# Altium PCB balenaFin HAT Template PCB.PcbDoc
Units mm, origin at the board's own origin, x right, y up, seen from the top; angles counter-clockwise.
Board outline 90 x 73 mm, 2 copper layers (Top Layer, Bottom Layer), stack 0.325 mm thick; 6 components, 3 nets, 68 pads, 0 vias.
Unrouted connection lines stored in the file: 12.
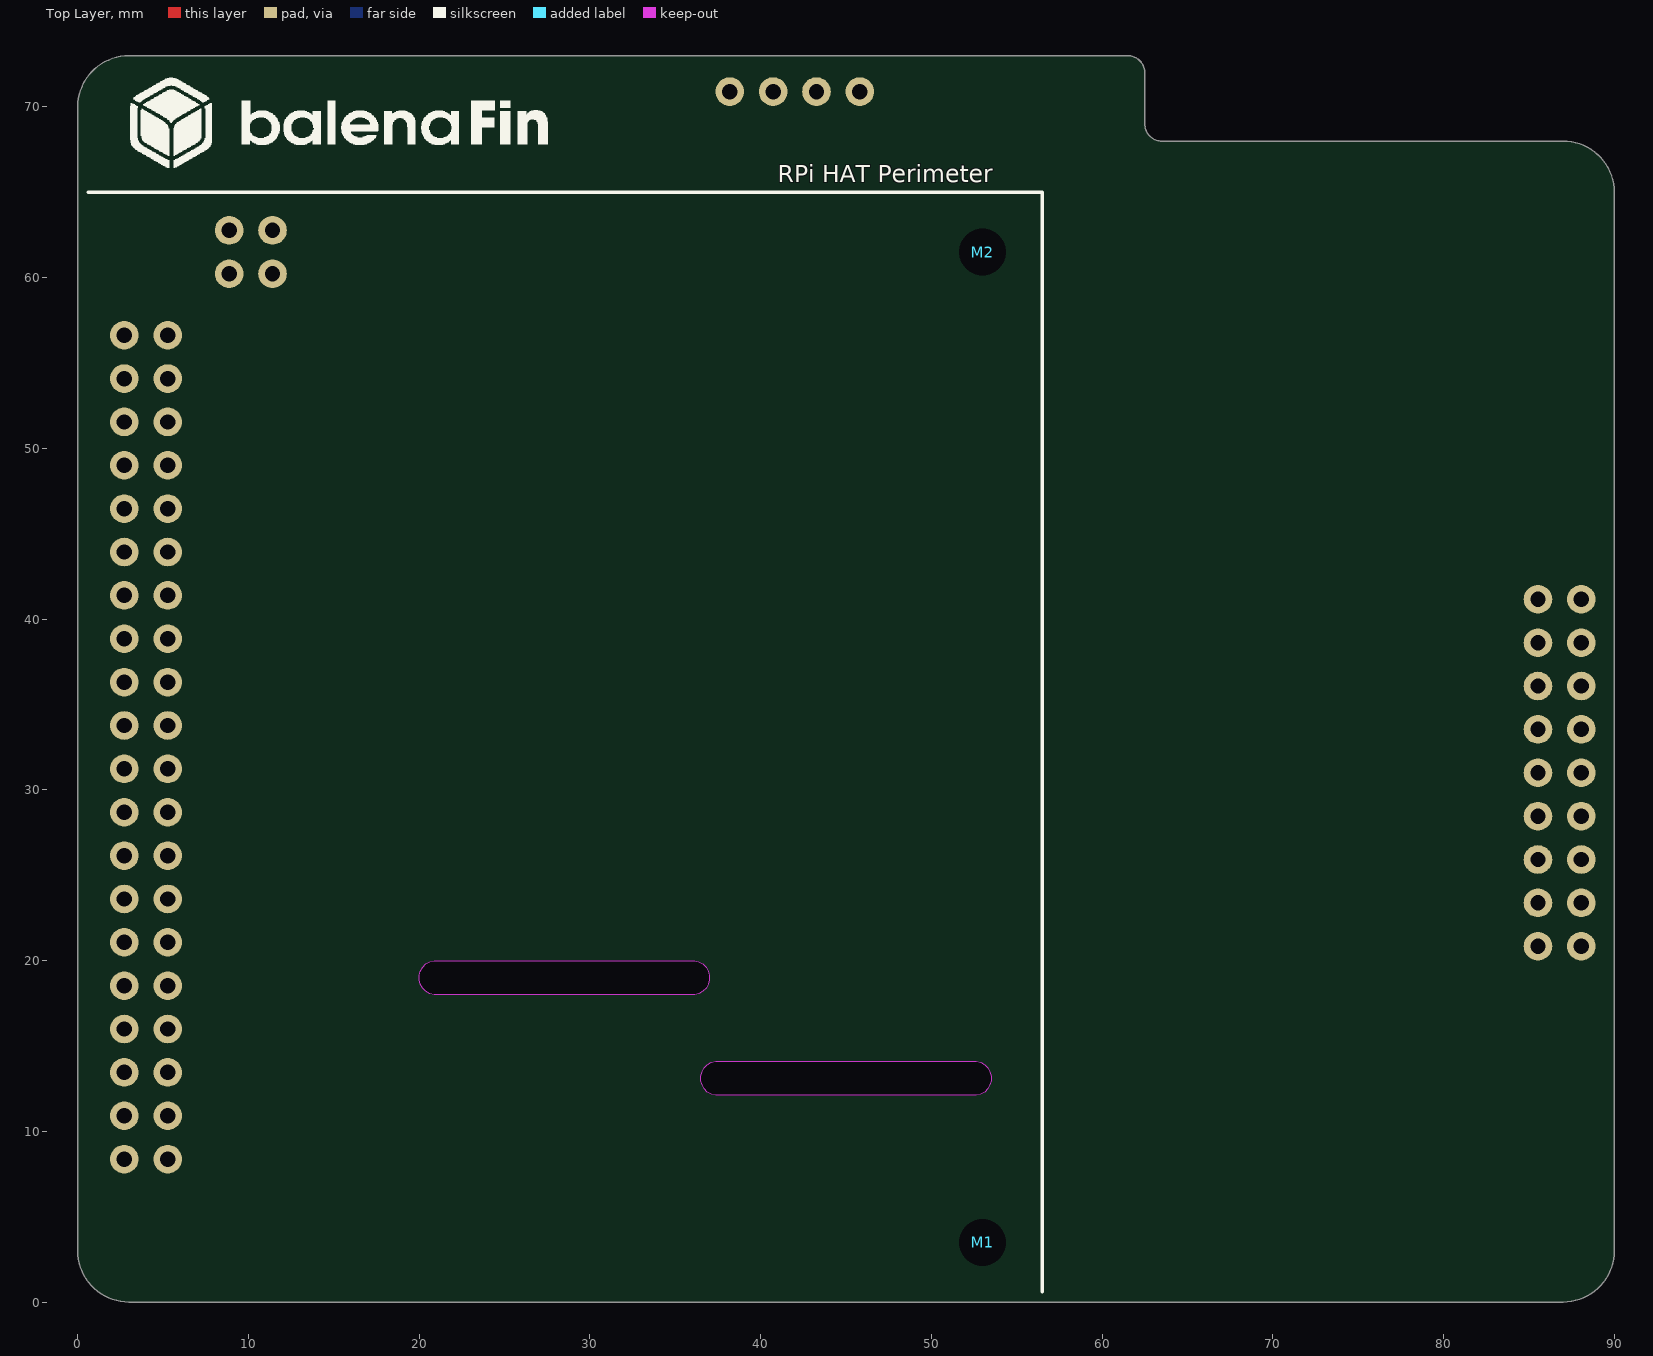
[diagram p0: Top Layer view]
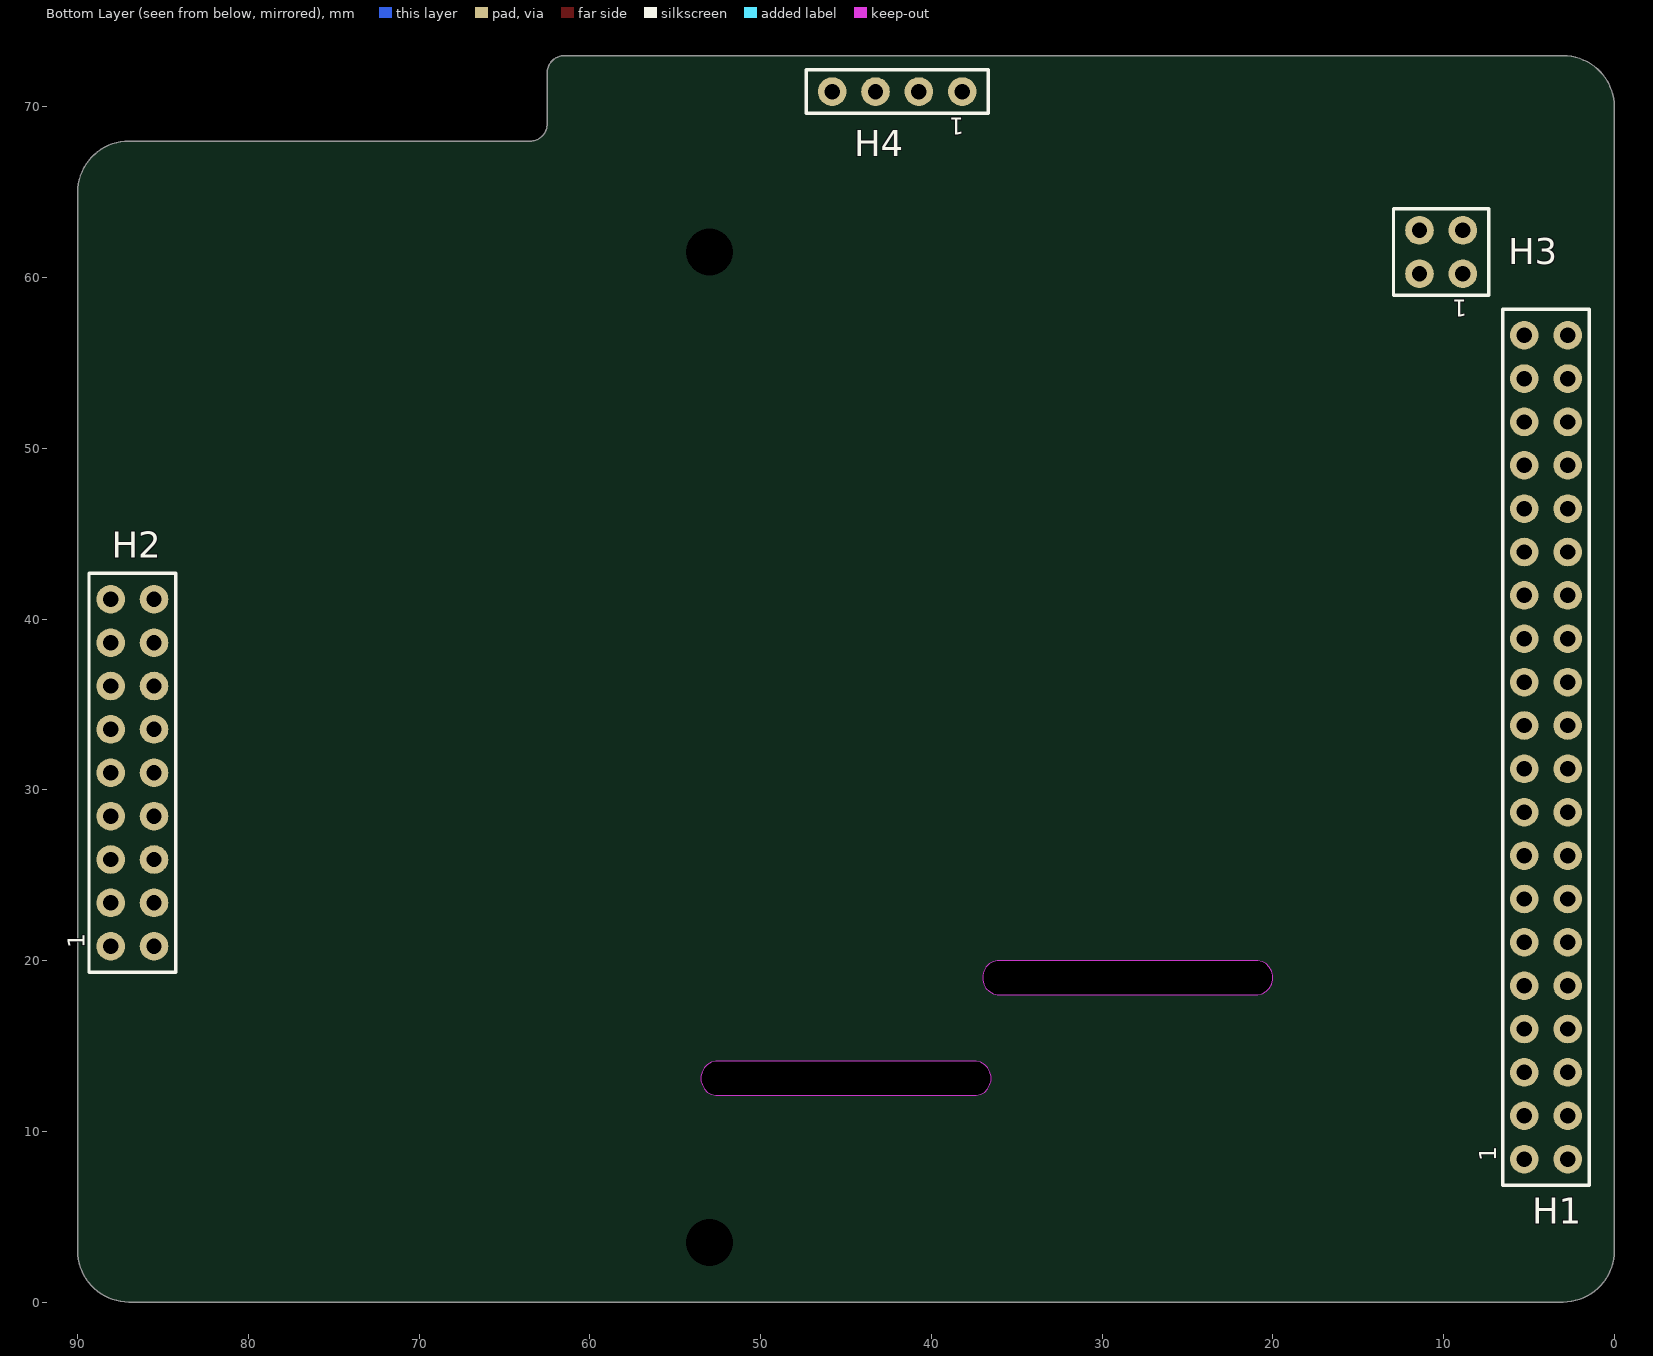
[diagram p1: Bottom Layer view, seen from below]

## Layer stack, top to bottom
Top Solder: solder mask 0.0102, Solder Resist, Dk 3.5
Top Layer: signal copper 0.0356
Core: core 0.254, FR-4, Dk 4.2
Bottom Layer: signal copper 0.0356
Bottom Solder: solder mask 0.0102, Solder Resist, Dk 3.5

## Board outline
0,3 0,70 cw(c3,70) 3,73 61.5,73 cw(c61.5,72) 62.5,72 62.5,69 ccw(c63.5,69) 63.5,68 87,68 cw(c87,65) 90,65 90,3 cw(c87,3) 87,0 3,0 cw(c3,3)
cut-out: 37.5,12.1 37.368,12.1 37.114,12.168 36.886,12.3 36.7,12.486 36.568,12.714 36.5,12.968 36.5,13.232 36.568,13.486 36.7,13.714 36.886,13.9 37.114,14.032 37.368,14.1 37.5,14.1 52.5,14.1 52.632,14.1 52.886,14.032 53.114,13.9 53.3,13.714 53.432,13.486 53.5,13.232 53.5,12.968 53.432,12.714 53.3,12.486 53.114,12.3 52.886,12.168 52.632,12.1 52.5,12.1
cut-out: 21,18 20.868,18 20.614,18.068 20.386,18.2 20.2,18.386 20.068,18.614 20,18.868 20,19.132 20.068,19.386 20.2,19.614 20.386,19.8 20.614,19.932 20.868,20 21,20 36,20 36.132,20 36.386,19.932 36.614,19.8 36.8,19.614 36.932,19.386 37,19.132 37,18.868 36.932,18.614 36.8,18.386 36.614,18.2 36.386,18.068 36.132,18 36,18

## Design rules (kind name [scope] priority, off if disabled: settings)
Clearance [All] p1: gap=0.254 ignorepadtopadclearanceinfootprint=FALSE except(0: Arc-Hole Track-Hole SMDPad-Hole THPad-Hole Via-Hole Fill-Hole Poly-Hole Region-Hole Text-Hole)
HoleSize [All] p1: absolutevalues=TRUE maxlimit=3 minlimit=0.025 maxpercent=80.000 minpercent=20.000
PolygonConnect [All] p1: connectstyle=Relief reliefconductorwidth=0.254 reliefentries=4 polygonreliefangle="90 Angle" airgapwidth=0.254
RoutingVias [All] p1: holewidth=0.711 width=1.27 viastyle="Through Hole" minholewidth=0.711 minwidth=1.27 maxholewidth=0.711 maxwidth=1.27
SolderMaskExpansion [All] p1: expansion=0.102
Width [All] p1: maxlimit=0.254 minlimit=0.254 preferedwidth=0.254
29 further rules are at their usual default settings.

## Classes and differential pairs
component class "3- balenaFin HAT MECH": M1 M2

## Components (designator, comment, footprint, x,y, rotation, side; value= is the part's Value field where it differs from the comment)
H1 "RaspberryPi CM3 HAT" HDR2x20_2mm54 4,32.5 r90 bottom
H2 "Co-Processor HAT" HDR2x9_2mm54 86.8,31 r90 bottom
H3 "balenaFin PoE Header" HDR2x2_2mm54 10.14,61.5 r0 bottom
H4 "balenaFin USB Header" HDR1x4_2mm54 42,70.9 r0 bottom
M1 "2.5mm Mounting Hole" "2.5mm Mounting Hole" 53,3.5 r0 top
M2 "2.5mm Mounting Hole" "2.5mm Mounting Hole" 53,61.5 r0 top

## Footprints (in the part's own frame and the unit in brackets; to place one, negate y for a bottom-side part, rotate by r counter-clockwise, add the part's x,y. Pads: shape width x height; smd on the part's side, far side on the other; paste and mask are expansions set on the pad)
"2.5mm Mounting Hole" [mm]
  round 0 hole 2.75 unplated paste+0 mask+3.1: 1(0,0)
HDR1x4_2mm54 [mil] "Female Header 1x4 pin 2.54mm spacing"
  round 66 hole 35.43: 1(-150,0) 2(-50,0) 3(50,0) 4(150,0)
  silkscreen extent -210,-50 210,50, body extent -210,-50 210,50, height 335
HDR2x2_2mm54 [mil] "Female Header 2x2 pin 2.54mm spacing"
  round 66 hole 35.43: 1(-50,50) 2(-50,-50) 3(50,50) 4(50,-50)
  silkscreen extent -110,-100 110,100, body extent -110,-100 110,100, height 335
HDR2x9_2mm54 [mil] "Female Header 2x9 pin 2.54mm spacing"
  round 66 hole 35.43: 1(-400,50) 2(-400,-50) 3(-300,50) 4(-300,-50) 5(-200,50) 6(-200,-50) 7(-100,50) 8(-100,-50) 9(0,50) 10(0,-50) 11(100,50) 12(100,-50) 13(200,50) 14(200,-50) 15(300,50) 16(300,-50) 17(400,50) 18(400,-50)
  silkscreen extent -460,-100 460,100, body extent -460,-100 460,100, height 335
HDR2x20_2mm54 [mil] "Female Header 2x20 pin 2.54mm spacing"
  round 66 hole 35.43: 1(-950,50) 2(-950,-50) 3(-850,50) 4(-850,-50) 5(-750,50) 6(-750,-50) 7(-650,50) 8(-650,-50) 9(-550,50) 10(-550,-50) 11(-450,50) 12(-450,-50) 13(-350,50) 14(-350,-50) 15(-250,50) 16(-250,-50) 17(-150,50) 18(-150,-50) 19(-50,50) 20(-50,-50) 21(50,50) 22(50,-50) 23(150,50) 24(150,-50) 25(250,50) 26(250,-50) 27(350,50) 28(350,-50) 29(450,50) 30(450,-50) 31(550,50) 32(550,-50) 33(650,50) 34(650,-50) 35(750,50) 36(750,-50) 37(850,50) 38(850,-50) 39(950,50) 40(950,-50)
  silkscreen extent -1010,-100 1010,100, body extent -1010,-100 1010,100, height 335

## Part data
H1: library part CM3_Header, "Raspberry Pi CM3 HAT Socket"
H2: library part COP_Header, "balenaFin Co-Processor HAT Socket"
H3: library part POE_Header
H4: library part USB_Header

## Nets (pads, with @x,y where several pads share a name; then routed paths per layer and width w, separated by ;. In a path a pad name is that pad's centre, name@x,y a point inside that pad or via, vN(x,y) a via of type N, cw(c..) or ccw(c..) an arc to the next point about the centre after c; other vN are vias at no path point)
3V3: H1.1 H1.17
5V: H1.2 H1.4 H4.1
GND: H1.6 H1.9 H1.14 H1.20 H1.25 H1.30 H1.34 H1.39 H2.17 H4.4
pads on no net: H1.3 H1.5 H1.7 H1.8 H1.10 H1.11 H1.12 H1.13 H1.15 H1.16 H1.18 H1.19 H1.21 H1.22 H1.23 H1.24 H1.26 H1.27 H1.28 H1.29 H1.31 H1.32 H1.33 H1.35 H1.36 H1.37 H1.38 H1.40 H2.1 H2.2 H2.3 H2.4 H2.5 H2.6 H2.7 H2.8 H2.9 H2.10 H2.11 H2.12 H2.13 H2.14 H2.15 H2.16 H2.18 H3.1 H3.2 H3.3 H3.4 H4.2 H4.3 M1.1 M2.1

## Silkscreen, mask and mechanical layers (free items; w line width, h text height)
Top Overlay:
  drawing of 40 lines, arcs and shapes, not listed
  text "RPi HAT Perimeter" at 41,65.6 h1
Board Outline (M1):
  lines w0.2: 56.4,0 56.5,0.1
  lines w0.5: 0,3 ccw(c3,3) 3,0 87,0 ccw(c87,3) 90,3 90,65 ccw(c87,65) 87,68 63.5,68 cw(c63.5,69) 62.5,69 62.5,72 ccw(c61.5,72) 61.5,73 3,73 ccw(c3,70) 0,70 0,3 ; 21,18 cw(c21,19) 21,20 36,20 cw(c36,19) 36,18 21,18 ; 37.5,12.1 cw(c37.5,13.1) 37.5,14.1 52.5,14.1 cw(c52.5,13.1) 52.5,12.1 37.5,12.1
PCB Notes (M2):
  drawing of 191 lines, arcs and shapes, not listed
  text "Layer" at -12.927,-5.104 h1.52
  text "Name" at -2.516,-5.104 h1.52
  text "Material" at 21.1,-5.104 h1.52
  text "Thickness" at 42.938,-5.104 h1.52
  text "Constant" at 59.444,-5.104 h1.52
  text "Board Layer Stack" at 73.918,-5.104 h1.52
  text "1" at -12.927,-8.152 h1.52
  text "Top Overlay" at -2.516,-8.152 h1.52
  text "2" at -12.927,-11.2 h1.52
  text "Top Solder" at -2.516,-11.2 h1.52
  text "Solder Resist" at 21.1,-11.2 h1.52
  text "0.010mm" at 42.938,-11.2 h1.52
  text "3.5" at 59.444,-11.2 h1.52
  text "3" at -12.927,-14.248 h1.52
  text "Top Layer" at -2.516,-14.248 h1.52
  text "Copper" at 21.1,-14.248 h1.52
  text "0.036mm" at 42.938,-14.248 h1.52
  text "4" at -12.927,-17.296 h1.52
  text "Core" at -2.516,-17.296 h1.52
  text "FR-4" at 21.1,-17.296 h1.52
  text "0.254mm" at 42.938,-17.296 h1.52
  text "4.2" at 59.444,-17.296 h1.52
  text "5" at -12.927,-20.344 h1.52
  text "Bottom Layer" at -2.516,-20.344 h1.52
  text "Copper" at 21.1,-20.344 h1.52
  text "0.036mm" at 42.938,-20.344 h1.52
  text "6" at -12.927,-23.392 h1.52
  text "Bottom Solder" at -2.516,-23.392 h1.52
  text "Solder Resist" at 21.1,-23.392 h1.52
  text "0.010mm" at 42.938,-23.392 h1.52
  text "3.5" at 59.444,-23.392 h1.52
  text "7" at -12.927,-26.44 h1.52
  text "Bottom Overlay" at -2.516,-26.44 h1.52
Mechanical Drawings (M4):
  lines w0.5: 0,3 ccw(c3,3) 3,0 87,0 ccw(c87,3) 90,3 90,65 ccw(c87,65) 87,68 63.5,68 cw(c63.5,69) 62.5,69 62.5,72 ccw(c61.5,72) 61.5,73 3,73 ccw(c3,70) 0,70 0,3 ; 21,18 cw(c21,19) 21,20 36,20 cw(c36,19) 36,18 21,18 ; 37.5,12.1 cw(c37.5,13.1) 37.5,14.1 52.5,14.1 cw(c52.5,13.1) 52.5,12.1 37.5,12.1
Top Courtyard (M15):
  text "Top Courtyard" at 2.1,74.5 h3
Bottom Courtyard (M16):
  text "Bottom Courtyard" at 48.5,74.9 h3
Drill Drawing:
  lines w0.254: -29.691,-42.543 -29.267,-42.543 -28.844,-42.967 -28.421,-42.543 -27.997,-42.543 -28.421,-42.12 -27.997,-41.697 -28.421,-41.697 -28.844,-41.273 -29.267,-41.697 -29.691,-41.697 -29.267,-42.12 -29.691,-42.543 ; -29.691,-39.157 -27.997,-39.157 -27.997,-37.463 -29.691,-37.463 -29.691,-39.157
  lines w0.381: -31.21,-36.49 239.936,-36.49 ; -17.217,-44.11 -17.217,-32.68 ; -6.196,-44.11 -6.196,-32.68 ; 23.005,-44.11 23.005,-32.68 ; 35.854,-44.11 35.854,-32.68 ; 54.493,-44.11 54.493,-32.68 ; 92.582,-44.11 92.582,-32.68 ; 107.564,-44.11 107.564,-32.68 ; 126.507,-44.11 126.507,-32.68 ; 149.361,-44.11 149.361,-32.68 ; 171.046,-44.11 171.046,-32.68 ; 204.92,-44.11 204.92,-32.68 ; -31.21,-44.11 239.936,-44.11 239.936,-32.68 -31.21,-32.68 -31.21,-44.11
  text "Symbol" at -28.924,-35.347 h1.83
  text "Count" at -16.074,-35.347 h1.83
  text "Hole Size" at -5.053,-35.347 h1.83
  text "Plated" at 24.148,-35.347 h1.83
  text "Hole Type" at 36.997,-35.347 h1.83
  text "Drill Layer Pair" at 55.636,-35.347 h1.83
  text "Via/Pad" at 93.725,-35.347 h1.83
  text "Pad Shape" at 108.707,-35.347 h1.83
  text "Template" at 127.65,-35.347 h1.83
  text "Description" at 150.504,-35.347 h1.83
  text "Hole Tolerance (+)" at 172.189,-35.347 h1.83
  text "Hole Tolerance (-)" at 206.063,-35.347 h1.83
  text "66" at -16.074,-39.157 h1.52
  text "0.900mm (35.43mil)" at -5.053,-39.157 h1.52
  text "PTH" at 24.148,-39.157 h1.52
  text "Round" at 36.997,-39.157 h1.52
  text "Top Layer - Bottom Layer" at 55.636,-39.157 h1.52
  text "Pad" at 93.725,-39.157 h1.52
  text "Rounded" at 108.707,-39.157 h1.52
  text "c168h90" at 127.65,-39.157 h1.52
  text "2" at -16.074,-42.967 h1.52
  text "2.750mm (108.27mil)" at -5.053,-42.967 h1.52
  text "NPTH" at 24.148,-42.967 h1.52
  text "Round" at 36.997,-42.967 h1.52
  text "Top Layer - Bottom Layer" at 55.636,-42.967 h1.52
  text "Pad" at 93.725,-42.967 h1.52
  text "Rounded" at 108.707,-42.967 h1.52
  text "c0hn275m310p-1" at 127.65,-42.967 h1.52

## Dimensions
0,70 to 90,65 on Mechanical Drawings (M4)
0,70 to 62.5,69 on Mechanical Drawings (M4)
62.5,69 to 90,69.9 on Mechanical Drawings (M4)
87,68 to 87,0 on Mechanical Drawings (M4)
61.5,73 to 63.5,68 on Mechanical Drawings (M4)
93.4,0 to 94.4,73 on Mechanical Drawings (M4)
3,3 to -6.6,4.8 on Mechanical Drawings (M4)
3,70 to -5.4,74.1 on Mechanical Drawings (M4)
61.5,72 to 65.857,76.357 on Mechanical Drawings (M4)
63.5,69 to 57.1,77.7 on Mechanical Drawings (M4)
87,65 to 100.4,76.1 on Mechanical Drawings (M4)
87,3 to 98.2,-2 on Mechanical Drawings (M4)
21,18 to 3,0 on Mechanical Drawings (M4)
52.5,12.1 to 87,0 on Mechanical Drawings (M4)
20,19 to 37,19 on Mechanical Drawings (M4)
36,20 to 36,18 on Mechanical Drawings (M4)
21,19 to 16.6,19.3 on Mechanical Drawings (M4)
20,19 to 0,3 on Mechanical Drawings (M4)
53.5,13.1 to 90,3 on Mechanical Drawings (M4)
53,3.5 to 87,0 on Mechanical Drawings (M4)
87,0 to 53,61.5 on Mechanical Drawings (M4)
53,61.5 to 90,65 on Mechanical Drawings (M4)
3,0 to 6.54,32.5 on Bottom Dimensions (M12)
87,0 to 88.07,31 on Bottom Dimensions (M12)
7.35,61.5 to 3,0 on Bottom Dimensions (M12)
45.81,70.9 to 93.7,0 on Bottom Dimensions (M12)
0,70 to 4,58.15 on Bottom Dimensions (M12)
0,70 to 10.14,64.04 on Bottom Dimensions (M12)
90,3 to 86.8,42.68 on Bottom Dimensions (M12)
90,71.9 to 42,72.17 on Bottom Dimensions (M12)

## Text inside footprints (layer, text, board x,y; h text height)
H1: Bottom Overlay "1" at 6.921,8.243 h1 r270
H2: Bottom Overlay "1" at 89.594,20.713 h1 r270
H3: Bottom Overlay "1" at 8.616,58.706 h1 r180
H4: Bottom Overlay "1" at 38.063,69.376 h1 r180